# EAGLE board 2wire-1602-v0 (EAGLE 5.07)
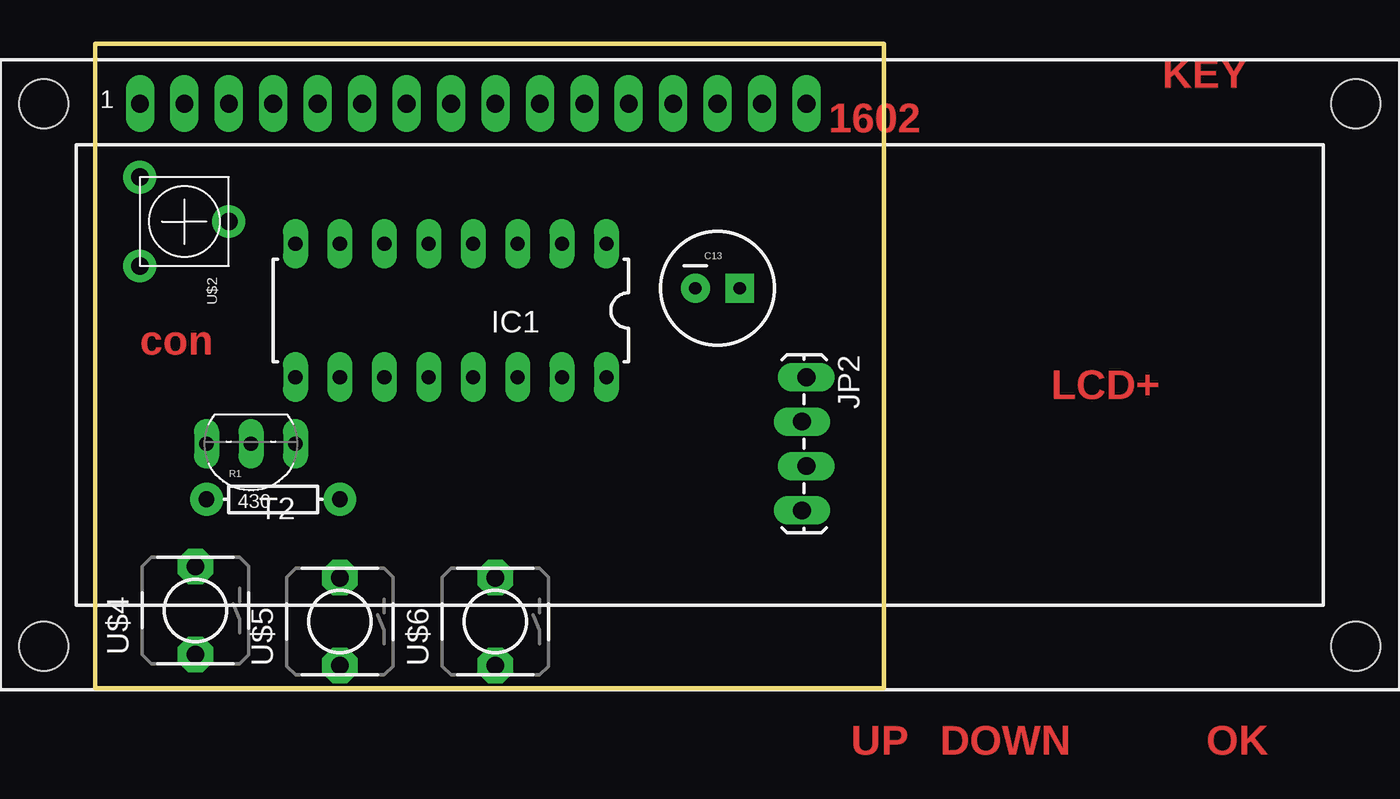
[diagram p0: board, top side]
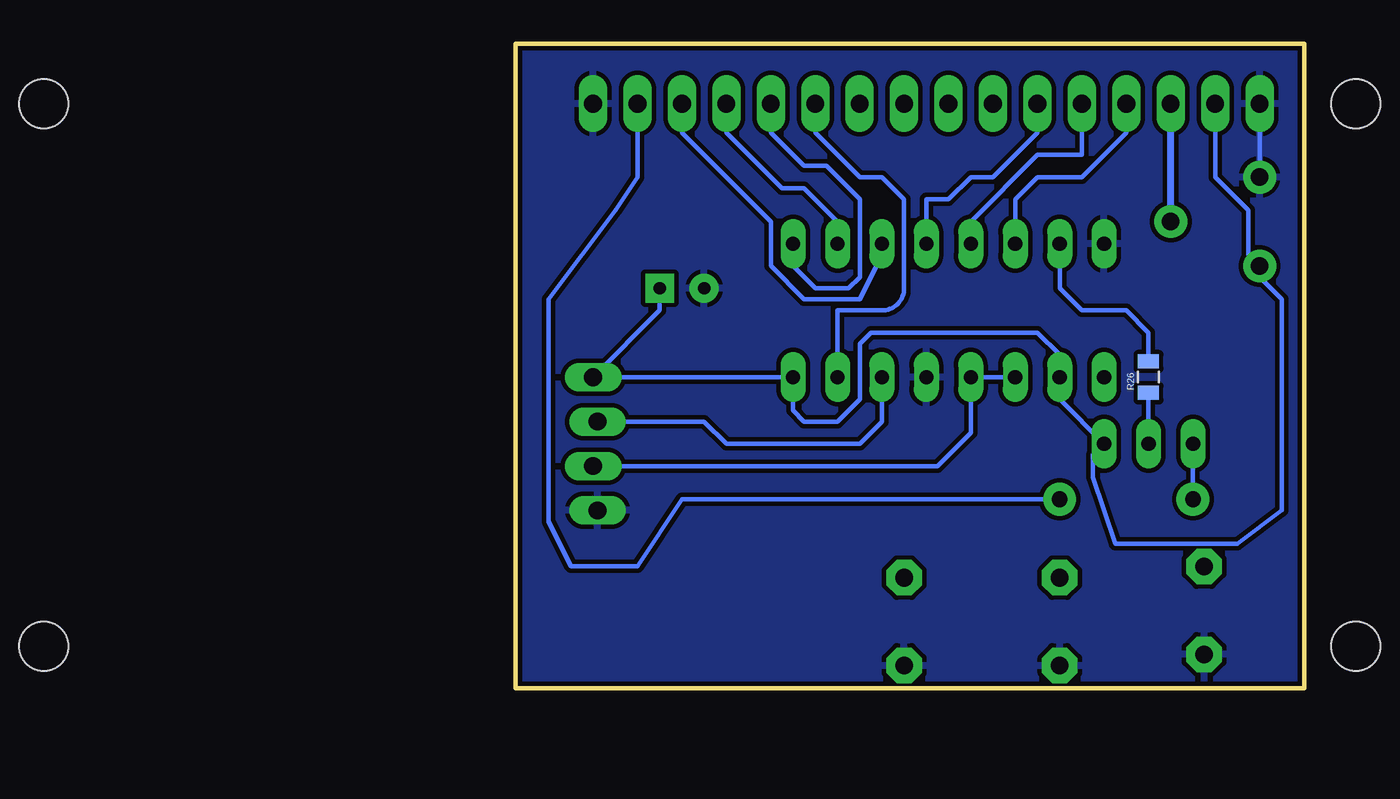
[diagram p1: board, bottom side, seen from below]

Size 45.09 x 36.83 mm. Coordinates in mm from the lower left corner, seen from the top.
Outline: 45.09,0 45.09,36.83 0,36.83 0,0 45.09,0
Copper layers (1*16): Top 0.035mm / dielectric 1.5mm / Bottom 0.035mm
Design rules "SparkFun": minimum track width 8mil, minimum drill 20mil, track to track 8mil, track to pad 8mil, pad to pad 8mil, via to via 8mil, smd to smd 8mil, copper to edge 10mil, drill to drill 8mil, minimum pad ring 12mil, minimum via ring 10mil, stop-mask expansion 4mil, vias tented up to drill 25mil, thermal gap 10mil

## Footprints (pad centres in the part's own frame; a part is rotated, then mirrored left to right if it is on the bottom)
CPOL-RADIAL-100UF-25V = drill 0.7 pad 1.651 square: 1 1.27,0 | drill 0.7 pad 1.651 round: 2 -1.27,0
DIL16 = drill 0.813 long: 1 -8.89,-3.81; 2 -6.35,-3.81; 3 -3.81,-3.81; 4 -1.27,-3.81; 5 1.27,-3.81; 6 3.81,-3.81; 7 6.35,-3.81; 8 8.89,-3.81; 9 8.89,3.81; 10 6.35,3.81; 11 3.81,3.81; 12 1.27,3.81; 13 -1.27,3.81; 14 -3.81,3.81; 15 -6.35,3.81; 16 -8.89,3.81
1X04_LOCK_LONGPADS = drill 1.016 long: 1 -3.81,0; 2 -1.27,-0.254; 3 1.27,0; 4 3.81,-0.254
AXIAL-0.3 = drill 0.9 pad 1.88 round: P$1 -3.81,0; P$2 3.81,0
0805 = smd 0.8 x 1.2: 1 -0.9,0; 2 0.9,0
TO92-EBC = drill 0.813 long: B 0,-1.27; C 2.54,-1.27; E -2.54,-1.27
LCD-16X2 = drill 1.016 long: 1 -32,15.5; 2 -29.46,15.5; 3 -26.92,15.5; 4 -24.38,15.5; 5 -21.84,15.5; 6 -19.3,15.5; 7 -16.76,15.5; 8 -14.22,15.5; 9 -11.68,15.5; 10 -9.14,15.5; 11 -6.6,15.5; 12 -4.06,15.5; 13 -1.52,15.5; 14 1.02,15.5; 15 3.56,15.5; 16 6.1,15.5 | hole 2.8: -37.5,15.5; -37.5,-15.5; 37.5,15.5; 37.5,-15.5
TRIM_POT_PTH = drill 1 pad 1.88 round: 1 -2.54,-2.54; 2 0,2.54; 3 2.54,-2.54
ALPS-SKHV = drill 1.016 pad 2.032 octagon: 2 -2.51,0; 3 2.51,0

## Placement (x,y rotation side)
C13  10u  [CPOL-RADIAL-100UF-25V]  35.56,22.86 0 top
IC1  74LS595N  [DIL16]  20.32,21.59 180 top
JP2  [1X04_LOCK_LONGPADS]  40.64,13.97 270 top
R1  430  [AXIAL-0.3]  10.16,10.8 0 top
R26  1k  [0805]  8.89,17.78 90 bottom
T2  8550  [TO92-EBC]  8.89,12.7 180 top
U$1  LCD-16X2  [LCD-16X2]  34.54,17.91 0 top
U$2  10k  [TRIM_POT_PTH]  5.08,26.67 270 top
U$4  UP  [ALPS-SKHV]  5.71,4.45 90 top
U$5  DOWN  [ALPS-SKHV]  13.97,3.81 90 top
U$6  OK  [ALPS-SKHV]  22.86,3.81 90 top

## Library data of the parts
C13 IC1 JP2 U$2 = SparkFun
R1 R26 T2 U$1 U$4-U$6 = digital-toy

## Nets
GND: C13.2 IC1.8 IC1.13 JP2.4 U$1.1 U$1.16 U$2.1 U$4.2 U$5.2 U$6.2
N$1: IC1.15 U$1.11
N$2: IC1.1 U$1.12
N$3: IC1.2 U$1.13
N$4: IC1.3 U$1.14
N$5: IC1.4 U$1.6
N$6: IC1.5 U$1.5
N$7: IC1.6 U$1.4
N$8: IC1.7 R26.2
N$10: IC1.14 JP2.2
N$12: IC1.11 IC1.12 JP2.3
N$15: U$1.3 U$2.2
N$16: R1.P$2 U$1.15
N$19: R1.P$1 T2.C
N$55: R26.1 T2.B
VCC: C13.1 IC1.10 IC1.16 JP2.1 T2.E U$1.2 U$2.3

## Tracks (layer width: path | path; a pad name or v marks a point on that pad's centre or on a via)
GND
  Bottom 0.254: U$1.1 U$2.1
  pour Bottom (isolate 0.254): 85.09,48.26 93.34,-3.17 -8.25,-1.9 -16.51,39.37 -3.81,49.53
N$1
  Bottom 0.254: IC1.15 26.67,21.59 24.13,21.59 arc-90 22.86,22.86 22.86,27.94 24.13,29.21 25.4,29.21 27.94,31.75 27.94,34.29 U$1.11
N$2
  Bottom 0.254: IC1.1 29.21,24.13 27.94,22.86 26.03,22.86 25.4,23.49 25.4,27.94 27.3,29.84 28.57,29.84 30.48,31.75 U$1.12
N$3
  Bottom 0.254: U$1.13 33.02,31.75 29.84,28.58 28.57,28.58 26.67,26.67 IC1.2
N$4
  Bottom 0.254: IC1.3 24.13,24.77 25.4,22.23 28.57,22.23 30.48,24.13 30.48,26.67 35.56,31.75 U$1.14
N$5
  Bottom 0.254: U$1.6 15.24,31.75 17.78,29.21 19.05,29.21 20.32,27.94 21.59,27.94 IC1.4
N$6
  Bottom 0.254: U$1.5 12.7,31.75 12.7,30.48 15.24,30.48 19.05,26.67 IC1.5
N$7
  Bottom 0.254: U$1.4 10.16,31.75 12.7,29.21 15.24,29.21 16.51,27.94 IC1.6
N$8
  Bottom 0.254: R26.2 8.89,20.32 10.16,21.59 12.7,21.59 13.97,22.86 IC1.7
N$10
  Bottom 0.254: JP2.2 34.29,15.24 33.02,13.97 25.4,13.97 24.13,15.24 IC1.14
N$12
  Bottom 0.254: IC1.11 IC1.12 19.05,14.61 20.95,12.7 JP2.3
N$15
  Bottom 0.406: U$1.3 7.62,30.48 U$2.2
N$16
  Bottom 0.254: R1.P$2 35.56,10.8 38.1,6.98 41.91,6.98 43.18,9.52 43.18,22.23 39.37,27.3 38.1,29.21 U$1.15
N$19
  Bottom 0.254: R1.P$1 T2.C
N$55
  Bottom 0.254: T2.B R26.1
VCC
  Bottom 0.254: C13.1 36.83,21.59 JP2.1 IC1.16 29.21,15.88 28.57,15.24 26.67,15.24 25.4,16.51 25.4,19.68 24.77,20.32 15.24,20.32 13.97,19.05 IC1.10 13.97,16.51 T2.E 12.06,13.34 12.06,12.07 10.79,8.25 3.81,8.25 1.27,10.16 1.27,22.23 2.54,23.49 U$2.3 3.18,24.77 3.18,27.3 5.08,29.21 U$1.2

## Text on the board
Top: KEY | 1602 | con | LCD+ | UP | DOWN | OK | key pad shield V0